# Allegro board senior design v3.brd
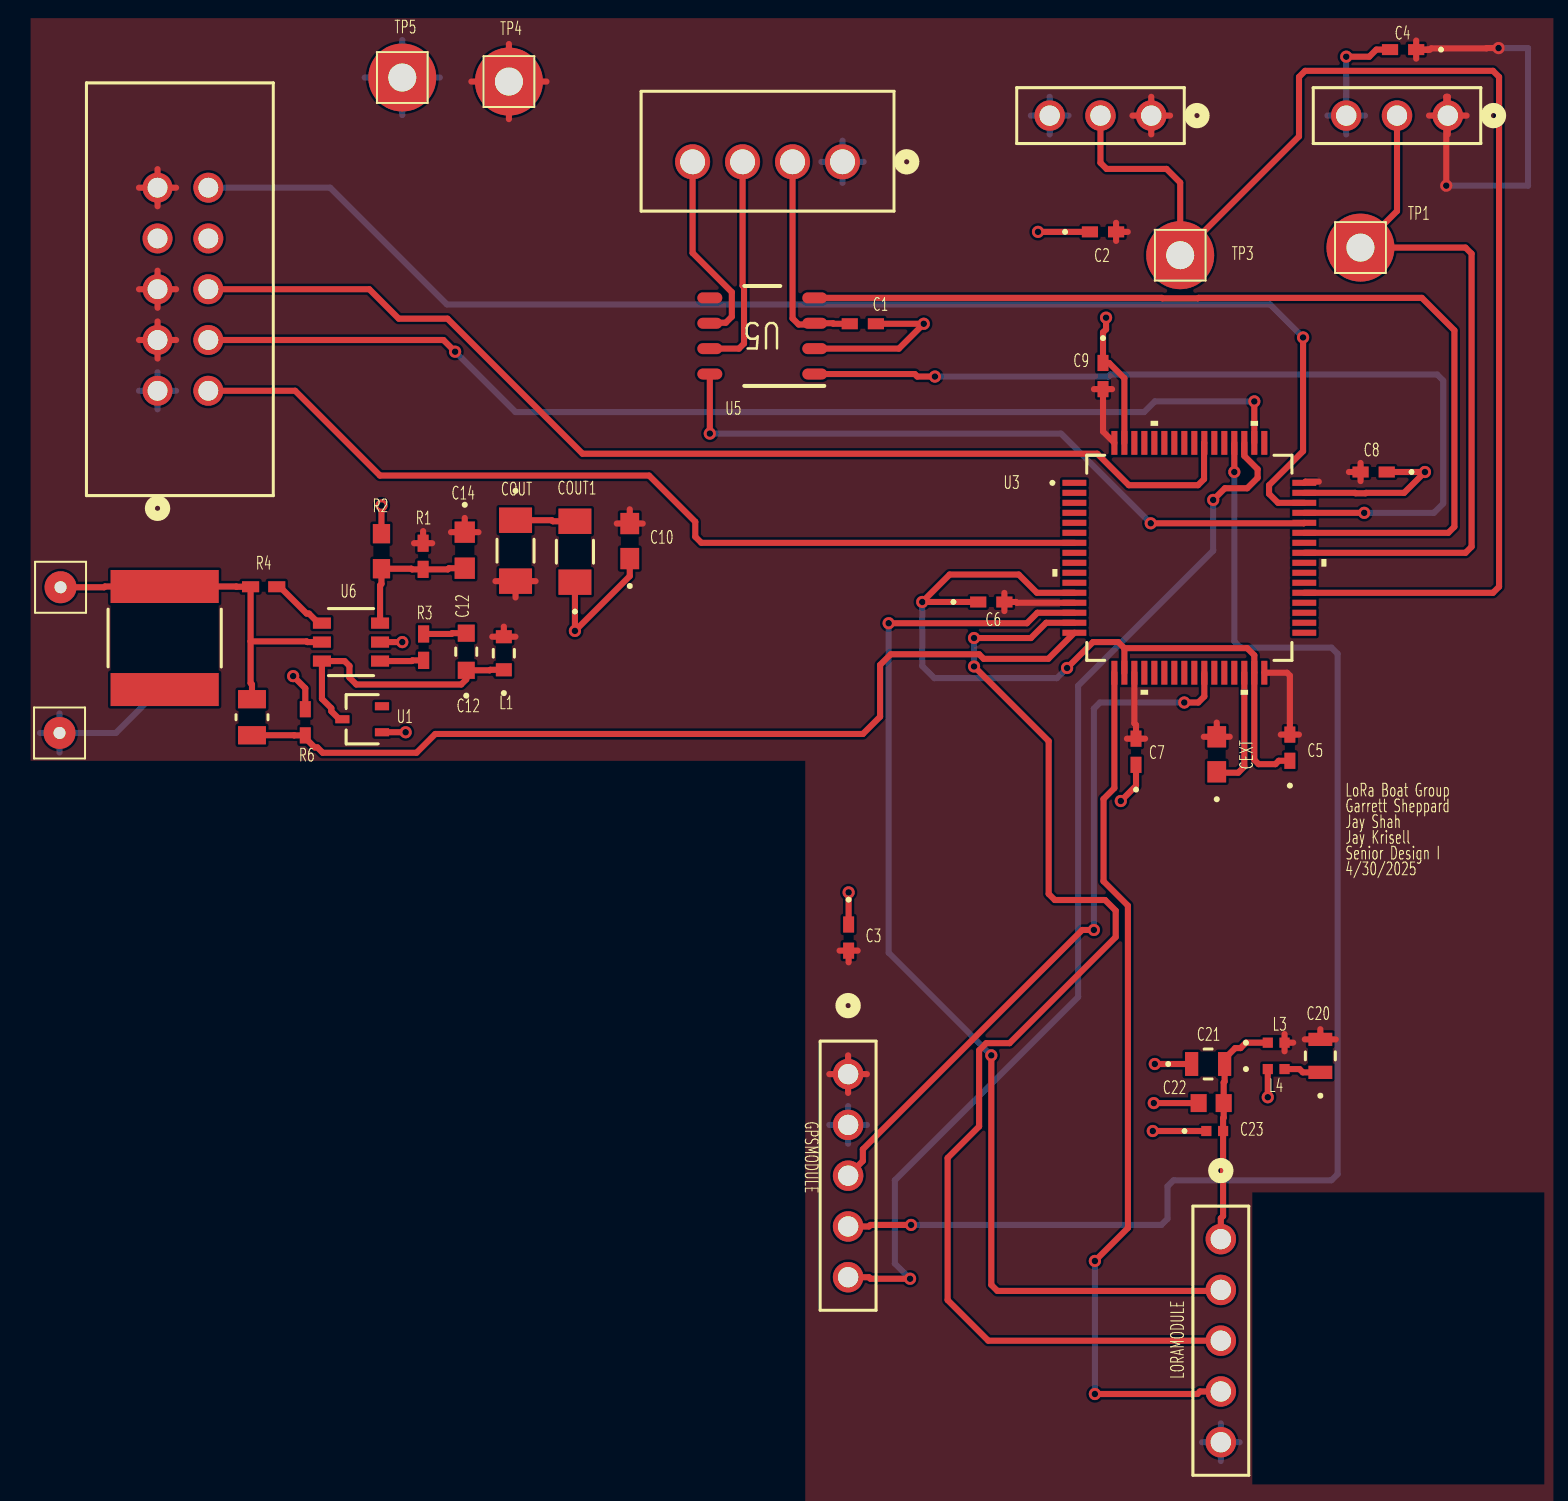
[diagram p0: board, top side]
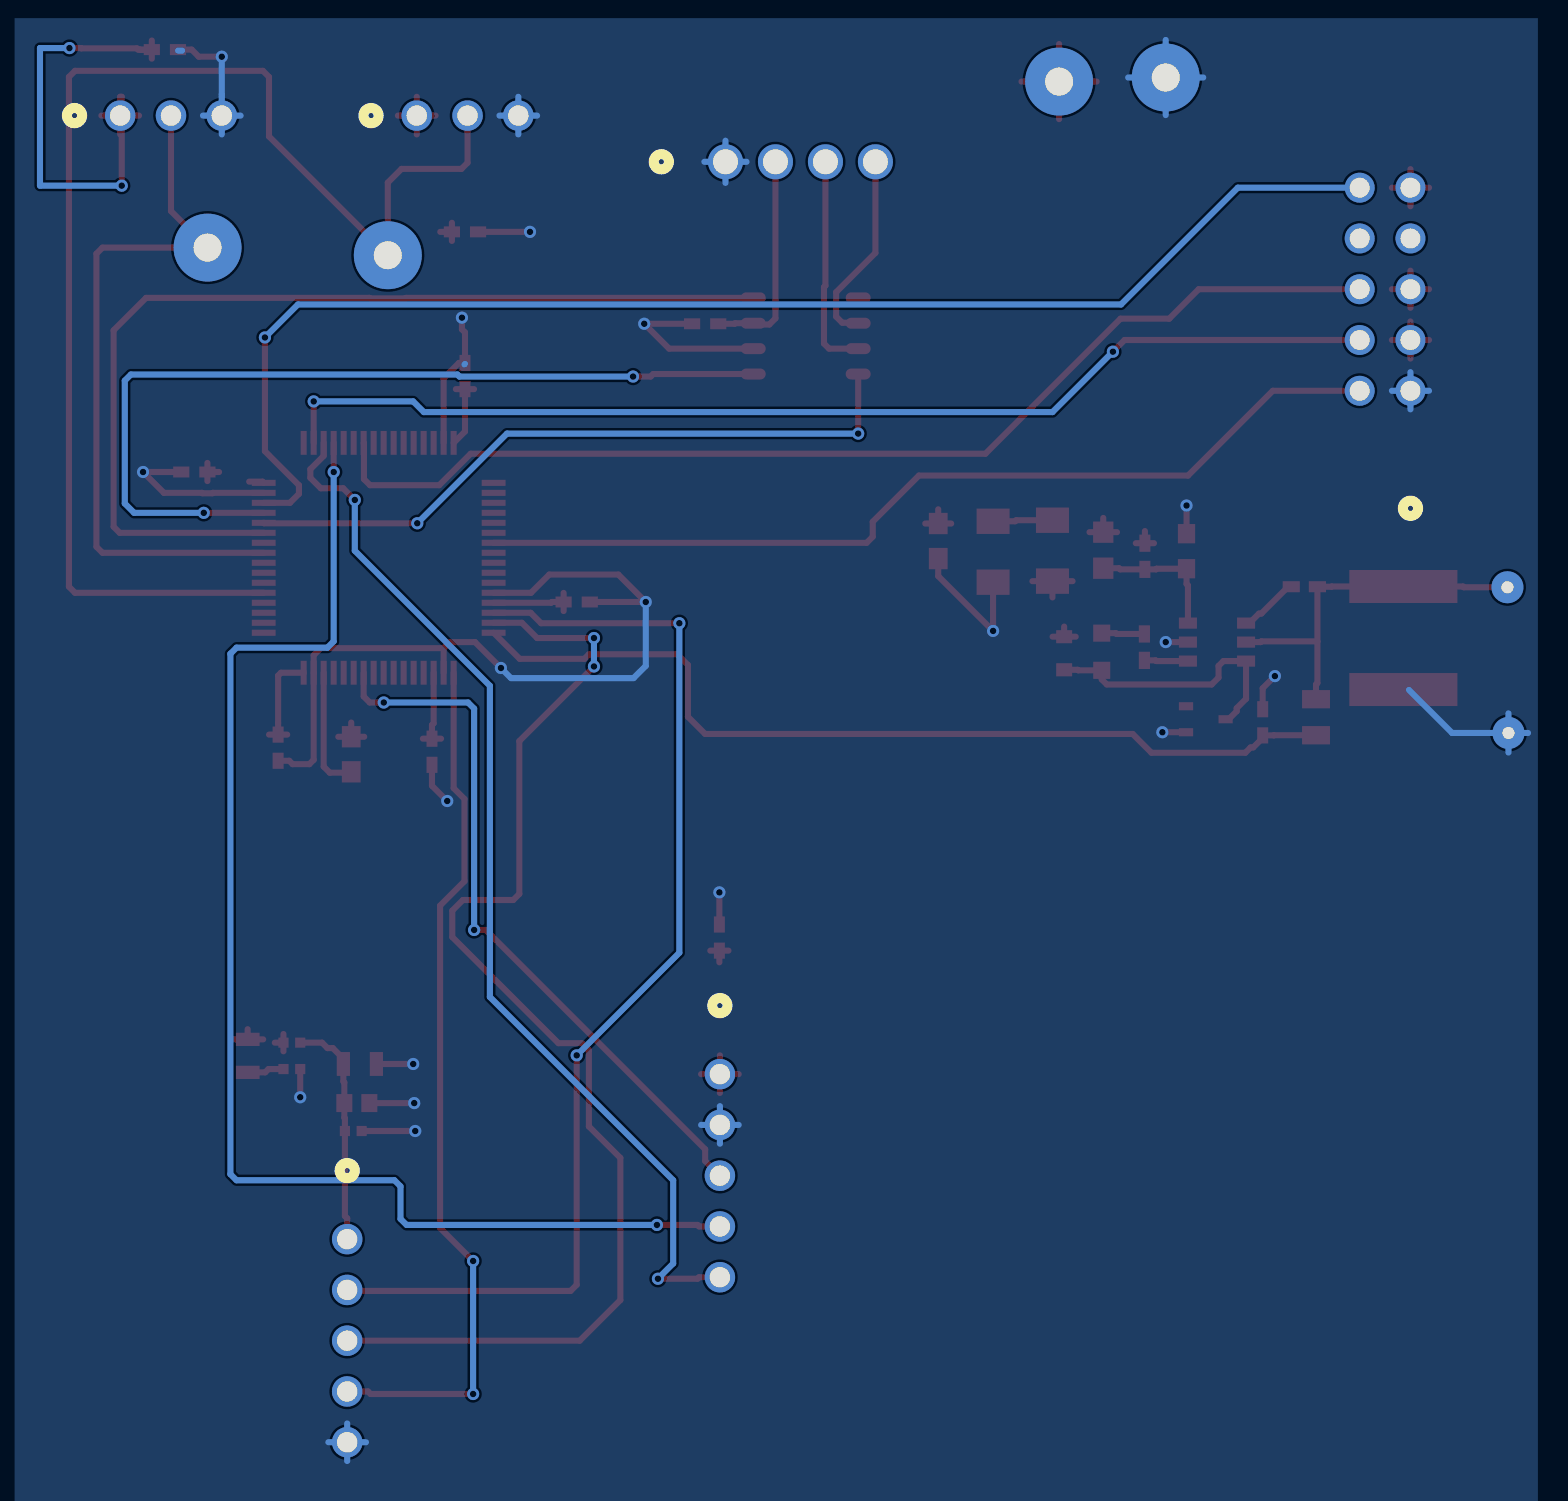
[diagram p1: board, bottom side, seen from below]

No outline. copper layers: TOP, BOTTOM. Coordinates in mm from the lowest, leftmost part position.

## Design rules (mm)
constraint set DEFAULT: min track width 0.305

## Placement (name value [footprint] x y rotation side)
C1  100n  [CAP_CL05_SAM-M]  40.18 45.8 180 top
C2  100n  [CAP_CL05_SAM-M]  52.2 50.39 0 top
C3  100n  [CAP_CL05_SAM-M]  39.47 15.09 270 top
C4  100n  [CAP_CL05_SAM-M]  67.21 59.51 180 top
C5  100n  [CAP_CL05_SAM-M]  61.54 24.59 90 top
C6  100n  [CAP_CL05_SAM-M]  46.61 31.88 0 top
C7  100n  [CAP_CL05_SAM-M]  53.85 24.38 90 top
C8  100n  [CAP_CL05_SAM-M]  65.74 38.38 180 top
C9  100n  [CAP_CL05_SAM-M]  52.2 43.18 270 top
C10  4.7uF  [CAP_0603_CL10A_1P6XP8_SAM-M]  28.52 34.92 90 top
C12  .1uf  [CAP_CL10_SAM-M]  20.35 29.39 90 top
C14  470pF  [CAP_0603G_AVX-M]  20.27 34.47 270 top
C20  10uF  [G-21_MUR-L]  63.07 9.17 90 top
C21  10uF  [G-21_MUR-L]  57.45 8.76 0 top
C22  .1uF  [CAPC17595_95N_KEM-L]  57.61 6.81 0 top
C23  47pF  [CAP_GJM1555C1H220JB01__MUR-L]  57.79 5.41 0 top
CANHEADER  CONN_B4B-XH-A  [CONN_B4B-XH-A_JST]  39.17 53.9 0 top
CEXT  4.7 uF  [CAP_0603_CL10A_1P6XP8_SAM-M]  57.89 24.26 90 top
CIN  10uF  [CAP_NTS_55_2P8T_NIP]  5.26 30.07 90 top
COUT  10uf  [G-31_MUR-M]  22.81 34.44 270 top
COUT1  10uf  [G-31_MUR-M]  25.78 34.39 90 top
GND  Battery-  [AMV_CON1]  0 25.32 0 top
GPSMODULE  CONN5_1LFBN-RC  [CONN5_1LFBN-RC_SUL]  39.45 8.25 270 top
JTAG  CONN_010P_000C_1  [CONN_SBH11-PBPC-D05-ST-BK_SUL]  4.9 42.44 90 top
L1  4.7uH  [IND_1608_TDK]  22.23 29.31 90 top
L3  INDUCTOR  [IND_BLM15_0402_MUR-L]  60.86 9.83 0 top
L4  INDUCTOR  [IND_BLM15_0402_MUR-L]  60.86 8.51 0 top
LORAMODULE  CONN5_1LFBN-RC  [CONN5_1LFBN-RC_SUL]  58.09 0 270 top
R1  15K  [RC0402N_PAN-M]  18.19 34.16 270 top
R2  4.7K  [RC0603N_YAG-M]  16.1 34.42 90 top
R3  51  [RC0402N_YAG-M]  18.21 29.62 270 top
R4  5.1K  [RC0402N_PAN-M]  10.21 32.64 0 top
R5  30K  [RES_R0805_ROM-M]  9.63 26.11 270 top
R6  10K  [RES_1005_SAM-M]  12.29 25.86 270 top
SPEEDCONTROLLER  CONN_PPTC031  [CONN_PPTC031_SUL]  69.44 56.21 0 top
STEERINGSERVO  CONN_PPTC031  [CONN_PPTC031_SUL]  54.61 56.21 0 top
TP1  TEST POINT  [AMV_TEST_POINT]  65.07 49.61 0 top
TP3  TEST POINT  [AMV_TEST_POINT]  56.06 49.23 0 top
TP4  TEST POINT  [AMV_TEST_POINT]  22.48 57.91 0 top
TP5  TEST POINT  [AMV_TEST_POINT]  17.15 58.12 0 top
U1  SB007-03Q-TL-E  [SOT-323-3_2X1P25_ONS-L]  15.14 26.01 90 top
U3  STM32F4XXR2  [LQFP64-10X10MM]  56.52 34.09 0 top
U5  TCAN1042H-Q1D  [D0008A_L]  35.15 45.19 180 top
U6  R1240N001x  [SOT-23-6W_PE-SOT23-6W-0512_NMD]  14.58 29.87 0 top
VIN  Battery+  [AMV_CON1]  0.05 32.61 0 top

## Library data of the parts
C1-C10 C12 C14 C20-C23 CEXT COUT COUT1 = C: User Part Number: PN; Tolerance: TOL
CANHEADER = B4B-XH-A: User Part Number: PN; Tolerance: TOL
CIN = KTS500B106M55N0T00: User Part Number: PN; Tolerance: TOL
GND VIN = CON1
GPSMODULE LORAMODULE = PPTC051LFBN-RC: User Part Number: PN; Tolerance: TOL
JTAG = SBH11-PBPC-D05-ST-BK: User Part Number: PN; Tolerance: TOL
L1 = SLF7045T-4R7M2R0-PF: User Part Number: PN; Tolerance: TOL
L3 L4 = INDUCTOR: User Part Number: PN; Tolerance: TOL
R1-R6 = R: User Part Number: PN; Tolerance: TOL
SPEEDCONTROLLER STEERINGSERVO = PPTC031LFBN-RC: User Part Number: PN; Tolerance: TOL
TP1 TP3-TP5 = TEST POINT
U1 = SB007-03Q-TL-E: User Part Number: PN; Tolerance: TOL
U3 = STM32F446RET6TR: User Part Number: PN; Tolerance: TOL
U5 = TCAN1042HDRQ1: Tolerance: TOL; User Part Number: PN
U6 = R1240N001B-TR-FE: User Part Number: PN; Tolerance: TOL

## Footprints (pads in the part's own frame, mm; a bottom-side part is the same pattern mirrored in y, then rotated)
AMV_CON1
  round 1.6 hole 0.6: 1(0,0)
AMV_TEST_POINT
  round 3.4 hole 1.4: 1(0,0)
CAP_0603_CL10A_1P6XP8_SAM-M
  rect 1.067x0.94 smd: 1(-0.876,0) 2(0.876,0)
CAP_0603G_AVX-M
  rect 1.067x1.016 smd: 1(-0.902,0) 2(0.902,0)
CAP_CL05_SAM-M
  rect 0.809x0.551 smd: 1(-0.654,0) 2(0.654,0)
CAP_CL10_SAM-M
  rect 0.859x0.851 smd: 1(-0.929,0) 2(0.929,0)
CAP_GJM1555C1H220JB01__MUR-L
  rect 0.508x0.508 smd: 1(-0.419,0) 2(0.419,0)
CAP_NTS_55_2P8T_NIP
  rect 1.651x5.41 smd: 1(-2.578,0) 2(2.578,0)
CAPC17595_95N_KEM-L
  rect 0.802x0.899 smd: 1(-0.626,0) 2(0.626,0)
CONN5_1LFBN-RC_SUL
  round 1.524 hole 1.016: 1(0,0) 2(2.54,0) 3(5.08,0) 4(7.62,0) 5(10.16,0)
CONN_B4B-XH-A_JST
  round 1.753 hole 1.245: 1(0,0) 2(-2.5,0) 3(-5,0) 4(-7.5,0)
CONN_PPTC031_SUL
  round 1.524 hole 1.016: 1(0,0) 2(-2.54,0) 3(-5.08,0)
CONN_SBH11-PBPC-D05-ST-BK_SUL
  round 1.499 hole 0.991: 1(0,0) 2(0,-2.54) 3(2.54,0) 4(2.54,-2.54) 5(5.08,0) 6(5.08,-2.54) 7(7.62,0) 8(7.62,-2.54) 9(10.16,0) 10(10.16,-2.54)
D0008A_L
  oval 1.25x0.55 smd: 1(-2.625,1.905) 2(-2.625,0.635) 3(-2.625,-0.635) 4(-2.625,-1.905) 5(2.625,-1.905) 6(2.625,-0.635) 7(2.625,0.635) 8(2.625,1.905)
G-21_MUR-L
  rect 0.66x1.194 smd: 1(-0.826,0) 2(0.826,0)
G-31_MUR-M
  rect 1.27x1.651 smd: 1(-1.524,0) 2(1.524,0)
IND_1608_TDK
  rect 0.656x0.8 smd: 1(-0.828,0) 2(0.828,0)
IND_BLM15_0402_MUR-L
  rect 0.508x0.508 smd: 1(-0.419,0) 2(0.419,0)
LQFP64-10X10MM
  rect 1.194x0.305 smd: 1(-5.75,3.75) 2(-5.75,3.25) 3(-5.75,2.75) 4(-5.75,2.25) 5(-5.75,1.75) 6(-5.75,1.25) 7(-5.75,0.75) 8(-5.75,0.25) 9(-5.75,-0.25) 10(-5.75,-0.75) 11(-5.75,-1.25) 12(-5.75,-1.75) 13(-5.75,-2.25) 14(-5.75,-2.75) 15(-5.75,-3.25) 16(-5.75,-3.75) 33(5.75,-3.75) 34(5.75,-3.25) 35(5.75,-2.75) 36(5.75,-2.25) 37(5.75,-1.75) 38(5.75,-1.25) 39(5.75,-0.75) 40(5.75,-0.25) 41(5.75,0.25) 42(5.75,0.75) 43(5.75,1.25) 44(5.75,1.75) 45(5.75,2.25) 46(5.75,2.75) 47(5.75,3.25) 48(5.75,3.75)
  rect 0.305x1.194 smd: 17(-3.75,-5.75) 18(-3.25,-5.75) 19(-2.75,-5.75) 20(-2.25,-5.75) 21(-1.75,-5.75) 22(-1.25,-5.75) 23(-0.75,-5.75) 24(-0.25,-5.75) 25(0.25,-5.75) 26(0.75,-5.75) 27(1.25,-5.75) 28(1.75,-5.75) 29(2.25,-5.75) 30(2.75,-5.75) 31(3.25,-5.75) 32(3.75,-5.75) 49(3.75,5.75) 50(3.25,5.75) 51(2.75,5.75) 52(2.25,5.75) 53(1.75,5.75) 54(1.25,5.75) 55(0.75,5.75) 56(0.25,5.75) 57(-0.25,5.75) 58(-0.75,5.75) 59(-1.25,5.75) 60(-1.75,5.75) 61(-2.25,5.75) 62(-2.75,5.75) 63(-3.25,5.75) 64(-3.75,5.75)
RC0402N_PAN-M
  rect 0.859x0.551 smd: 1(-0.654,0) 2(0.654,0)
RC0402N_YAG-M
  rect 0.864x0.559 smd: 1(-0.66,0) 2(0.66,0)
RC0603N_YAG-M
  rect 0.965x0.864 smd: 1(-0.876,0) 2(0.876,0)
RES_1005_SAM-M
  rect 0.809x0.551 smd: 1(-0.654,0) 2(0.654,0)
RES_R0805_ROM-M
  rect 0.914x1.397 smd: 1(-0.902,0) 2(0.902,0)
SOT-23-6W_PE-SOT23-6W-0512_NMD
  rect 0.902x0.559 smd: 1(-1.454,0.95) 2(-1.454,0) 3(-1.454,-0.95) 4(1.454,-0.95) 5(1.454,0) 6(1.454,0.95)
SOT-323-3_2X1P25_ONS-L
  rect 0.406x0.711 smd: 1(-0.65,-0.991) 2(0.65,-0.991) 3(0,0.991)

## Nets
3.3V: C2.2 C3.2 C4.1 C5.2 C6.2 C7.2 C8.2 C9.2 C10.2 C14.1 C20.2 CEXT.2 COUT.2 GPSMODULE.1 JTAG.3 JTAG.5 JTAG.9 L1.2 L3.2 R1.1 SPEEDCONTROLLER.1 STEERINGSERVO.1 TP4.1 U3.13 U3.19 U3.32 U3.48 U3.64
GND: CIN.1
VBAT: U3.1
0: C1.1 C2.1 C3.1 C4.2 C5.1 C6.1 C7.1 C8.1 C9.1 C10.1 C21.1 C22.1 C23.1 CANHEADER.1 COUT1.1 GND.1 GPSMODULE.2 JTAG.1 L4.1 LORAMODULE.5 R2.2 R6.1 SPEEDCONTROLLER.3 STEERINGSERVO.3 TP5.1 U1.1 U3.12 U3.18 U3.31 U3.47 U3.63 U5.2 U6.5
ADC: R5.2 R6.2 U3.16
PA13 TMS: JTAG.10 U3.46
PA14 TCLK: U3.49
PA14TCLK: JTAG.8
PA15 TDI: JTAG.4 U3.50
PB3 TBO: JTAG.6 U3.55
RESET: JTAG.2 U3.7
N04277: GPSMODULE.3 U3.26
N04281: GPSMODULE.4 U3.52
N04285: GPSMODULE.5 U3.51
N04355: SPEEDCONTROLLER.2 TP1.1 U3.41
N04395: STEERINGSERVO.2 TP3.1 U3.37
N04429: C21.2 C22.2 C23.2 L3.1 LORAMODULE.1
N04477: LORAMODULE.2 U3.14
N04485: LORAMODULE.3 U3.15
N04755: U3.44 U5.8
N04759: U3.43 U5.4
N04763: U3.45 U5.1
N04855: CANHEADER.4 U5.6
N17576: C14.2 R1.2 R2.1 U6.6
N17942: R3.2 U6.4
N18028: C12.1 L1.1 U1.3 U6.3
N24517: LORAMODULE.4 U3.17
N24691: CANHEADER.3 U5.7
N24886: C1.2 CANHEADER.2 U5.3(VCC)
N27410: C20.1 L4.2
N27791: CEXT.1 U3.30
N055670: R4.2 U6.1
N061071: C12.2 R3.1
N068040: COUT.1 COUT1.2
N088060: CIN.2 R4.1 R5.1 U6.2(VIN) VIN.1

Pads without a net: JTAG 7; U1 2; U3 2 3 4 5 6 8 9 10 11 20 21 22 23 24 25 27 28 29 33 34 35 36 38 39 40 42 53 54 56 57 58 59 60 61 62; U5 5

## Via types
v1: diameter 0.61, hole 0.33, TOP to BOTTOM, 39 vias

## Routing (per net, layer and track width the routed paths; a pad name or vN(x,y) marks a point on that pad's centre or on a via; arc(x,y) is an arc through that point)
3.3V: length 90.9
  TOP w0.305: 3.97,52.6 JTAG.9 ; JTAG.9 4.9,53.53 ; JTAG.9 4.9,51.68 ; JTAG.9 5.83,52.6 ; 68.45,59.51 68.43,59.5 67.88,59.5 C4.1 ; 68.45,59.51 C4.1 ; 68.45,59.51 68.55,59.51 68.61,59.57 71.38,59.57 71.4,59.59 v1(71.98,59.59) ; C9.2 52.65,42.53 ; C9.2 51.74,42.53 ; C9.2 52.2,40.4 U3.64 ; C14.1 20.27,36.08 ; C14.1 20.96,35.37 ; C14.1 19.58,35.37 ; 22.81,32.11 COUT.2 ; COUT.2 21.81,32.92 ; COUT.2 23.81,32.92 ; 57.24,25.13 CEXT.2 ; CEXT.2 58.53,25.13 ; CEXT.2 57.89,25.85 ; 68.5,56.21 SPEEDCONTROLLER.1 ; SPEEDCONTROLLER.1 70.38,56.21 ; SPEEDCONTROLLER.1 69.44,57.15 69.37,57.15 v1(69.37,52.7) ; SPEEDCONTROLLER.1 69.44,55.27 ; STEERINGSERVO.1 55.55,56.21 ; STEERINGSERVO.1 53.67,56.21 ; STEERINGSERVO.1 54.61,57.15 ; STEERINGSERVO.1 54.61,55.27 ; R1.1 18.64,34.82 ; R1.1 18.19,35.43 ; R1.1 17.73,34.82 ; 47.26,31.42 C6.2 ; C6.2 47.85,31.88 47.89,31.84 U3.13 ; C6.2 47.26,32.33 ; 27.88,35.8 C10.2 ; C10.2 28.52,36.51 ; C10.2 29.17,35.8 ; 20.6,57.91 TP4.1 ; TP4.1 22.48,59.79 ; TP4.1 22.48,56.03 ; TP4.1 24.36,57.91 ; C3.2 39.93,14.43 ; C3.2 39.02,14.43 ; C3.2 39.47,13.85 ; JTAG.3 5.83,44.98 ; JTAG.3 4.9,45.91 ; JTAG.3 3.97,44.98 ; JTAG.3 4.9,44.06 ; 61.28,9.4 L3.2 ; L3.2 61.71,9.83 ; L3.2 61.28,10.26 ; GPSMODULE.1 39.45,9.2 ; GPSMODULE.1 39.45,7.31 ; GPSMODULE.1 40.39,8.25 ; GPSMODULE.1 38.51,8.25 ; U3.19 53.76,25.81 53.85,25.72 C7.2 ; C4.1 67.86,59.97 ; C4.1 67.86,59.06 ; C8.2 65.08,38.83 ; C8.2 65.08,37.93 ; C8.2 64.5,38.38 ; C7.2 54.3,25.04 ; C7.2 53.39,25.04 ; C2.2 52.85,50.85 ; C2.2 52.85,49.94 ; C2.2 53.43,50.39 ; 3.97,47.52 JTAG.5 ; JTAG.5 4.9,46.6 ; JTAG.5 5.83,47.52 ; JTAG.5 4.9,48.45 ; C20.2 63.84,9.99 ; C20.2 62.29,9.99 ; C20.2 63.07,10.5 ; 61.09,25.24 C5.2 ; C5.2 62,25.24 ; C5.2 61.54,28.19 61.4,28.34 U3.32 ; L1.2 22.23,30.65 ; L1.2 21.65,30.14 ; L1.2 22.8,30.14 ; U3.48 62.32,37.9 62.99,37.9
  BOTTOM w0.305: v1(71.98,59.59) 73.46,59.59 73.46,52.7 v1(69.37,52.7)
0: length 135.7
  TOP w0.305: C3.1 v1(39.47,17.35) ; C6.1 v1(43.15,31.88) 44.53,33.25 47.98,33.25 48.89,32.34 U3.12 ; 53.27,29.57 U3.18 ; 53.27,29.57 52.96,29.87 51.69,29.87 v1(50.4,28.57) ; 53.27,29.57 59.41,29.57 59.76,29.21 U3.31 59.76,23.98 59.98,23.76 60.82,23.76 60.99,23.93 C5.1 ; R2.2 v1(16.1,36.7) ; COUT1.1 v1(25.78,30.43) 28.52,33.17 C10.1 ; C21.1 v1(54.79,8.76) ; v1(53.09,21.92) 53.85,22.68 C7.1 ; U3.63 53.27,43.07 52.5,43.83 C9.1 52.2,45.36 52.35,45.52 v1(52.35,46.1) ; C1.1 v1(43.23,45.8) 41.99,44.55 U5.2 ; v1(64.36,59.16) 65.51,59.16 65.87,59.51 C4.2 ; U1.1 v1(17.31,25.36) ; U3.47 64.81,37.34 64.83,37.32 65.33,37.32 65.35,37.34 67.26,37.34 v1(68.3,38.38) C8.1 ; v1(11.68,28.17) 12.29,27.56 R6.1 ; C22.1 v1(54.74,6.81) ; L4.1 v1(60.44,7.1) ; C23.1 v1(54.69,5.41) ; C2.1 v1(48.95,50.39) ; U6.5 v1(17.15,29.87)
  BOTTOM w0.305: 52.2,43.79 52.22,43.76 ; SPEEDCONTROLLER.3 65.3,56.21 ; SPEEDCONTROLLER.3 v1(64.36,59.16) ; SPEEDCONTROLLER.3 63.42,56.21 ; SPEEDCONTROLLER.3 64.36,55.27 ; 39.17,52.84 CANHEADER.1 ; CANHEADER.1 38.11,53.9 ; CANHEADER.1 40.22,53.9 ; CANHEADER.1 39.17,54.95 ; STEERINGSERVO.3 49.53,57.15 ; STEERINGSERVO.3 48.59,56.21 ; STEERINGSERVO.3 49.53,55.27 ; STEERINGSERVO.3 50.47,56.21 ; GND.1 2.82,25.32 4.98,27.48 ; GND.1 -0.98,25.32 ; GND.1 0,24.35 ; GND.1 0,26.3 ; TP5.1 17.15,59.99 ; TP5.1 19.02,58.12 ; TP5.1 15.27,58.12 ; TP5.1 17.15,56.24 ; JTAG.1 5.83,42.44 ; JTAG.1 3.97,42.44 ; JTAG.1 4.9,43.37 ; JTAG.1 4.9,41.52 ; LORAMODULE.5 58.09,-9.22 ; LORAMODULE.5 58.09,-11.1 ; LORAMODULE.5 59.03,-10.16 ; LORAMODULE.5 57.15,-10.16 ; v1(50.4,28.57) 49.89,28.07 43.76,28.07 43.15,28.68 v1(43.15,31.88) ; 66.34,59.46 66.55,59.46 ; 38.51,5.71 GPSMODULE.2 ; GPSMODULE.2 39.45,4.77 ; GPSMODULE.2 40.39,5.71 ; GPSMODULE.2 39.45,6.66
ADC: length 45.8
  TOP w0.305: U3.16 49.46,29.03 46.23,29.03 46,29.26 41.58,29.26 41.05,28.73 41.05,26.14 40.18,25.27 18.8,25.27 17.86,24.33 13.16,24.33 12.9,24.6 12.77,24.6 12.29,25.07 R6.2 11.74,25.2 11.73,25.21 R5.2
PA13 TMS: length 68.3
  TOP w0.305: U3.46 60.95,36.84 60.5,37.29 60.5,37.72 62.2,39.42 v1(62.2,45.11)
  BOTTOM w0.305: JTAG.10 13.54,52.6 19.38,46.76 60.55,46.76 v1(62.2,45.11)
PA15 TDI: length 56.1
  TOP w0.305: U3.50 v1(59.76,41.91) ; v1(19.79,44.4) 19.2,44.98 JTAG.4
  BOTTOM w0.305: v1(19.79,44.4) 22.81,41.38 54.25,41.38 54.79,41.91 v1(59.76,41.91)
PB3 TBO: length 55.8
  TOP w0.305: U3.55 57.25,39.82 57.25,38.02 56.95,37.72 53.49,37.72 51.91,39.29 26.16,39.29 19.41,46.05 16.97,46.05 15.49,47.52 JTAG.6
RESET: length 46.9
  TOP w0.305: JTAG.2 11.79,42.44 16.03,38.2 29.49,38.2 31.8,35.89 31.8,35.14 32.11,34.84 U3.7
N04277: length 35.8
  TOP w0.305: v1(51.74,15.47) 51.16,15.47 40.18,4.5 40.18,3.91 GPSMODULE.3 ; U3.26 57.27,27.15 56.96,26.85 v1(56.26,26.85)
  BOTTOM w0.305: v1(56.26,26.85) 52.04,26.85 51.74,26.54 v1(51.74,15.47)
N04281: length 67.9
  TOP w0.305: GPSMODULE.4 40.49,0.63 40.56,0.71 v1(42.6,0.71) ; U3.52 v1(58.76,38.38)
  BOTTOM w0.305: v1(42.6,0.71) 55.12,0.71 55.42,1.02 55.42,2.64 55.73,2.95 63.63,2.95 63.93,3.25 63.93,29.29 63.63,29.59 59.08,29.59 58.76,29.91 v1(58.76,38.38)
N04285: length 53.7
  TOP w0.305: GPSMODULE.5 40.49,-1.91 40.56,-1.98 v1(42.55,-1.98) ; U3.51 59.27,39.19 59.93,38.52 59.93,38.09 59.41,37.57 58.29,37.57 v1(57.71,36.98)
  BOTTOM w0.305: v1(57.71,36.98) 57.71,34.44 50.95,27.69 50.95,12.12 41.78,2.95 41.78,-1.22 v1(42.55,-1.98)
N04355: length 36.2
  TOP w0.305: SPEEDCONTROLLER.2 66.9,51.44 TP1.1 70.33,49.61 70.63,49.3 70.63,34.64 70.33,34.34 U3.41
N04395: length 67.4
  TOP w0.305: STEERINGSERVO.2 52.07,53.85 52.37,53.54 55.37,53.54 56.06,52.86 TP3.1 62,55.17 62,58.14 62.31,58.45 71.7,58.45 72.01,58.14 72.01,32.64 71.7,32.34 U3.37
N04429: length 11.6
  TOP w0.305: L3.1 59.35,9.83 59.07,9.56 58.81,9.56 58.28,9.03 C21.2 58.28,7.89 58.23,7.84 C22.2 58.23,6.08 58.2,6.05 C23.2 58.2,1.16 58.09,1.04 LORAMODULE.1
N04477: length 56.4
  TOP w0.305: 58.09,-2.54 58.04,-2.59 46.91,-2.59 46.61,-2.29 v1(46.61,9.19) ; U3.14 48.91,31.34 48.39,30.81 v1(41.47,30.81)
  BOTTOM w0.305: v1(46.61,9.19) 41.47,14.33 v1(41.47,30.81)
N04485: length 61.5
  TOP w0.305: LORAMODULE.3 46.46,-5.08 44.42,-3.05 44.42,4.06 46,5.64 46,9.45 46.36,9.8 47.52,9.8 52.83,15.11 52.83,16.43 52.3,16.97 49.78,16.97 49.48,17.27 49.48,24.92 v1(45.75,28.65) ; U3.15 49.35,30.84 48.59,30.07 v1(45.75,30.07)
  BOTTOM w0.305: v1(45.75,28.65) v1(45.75,30.07)
N04755: length 34.6
  TOP w0.305: v1(54.58,35.81) 62.24,35.81 U3.44 ; U5.8 v1(32.53,40.3)
  BOTTOM w0.305: v1(54.58,35.81) 50.1,40.3 v1(32.53,40.3)
N04759: length 50.1
  TOP w0.305: U3.43 69.47,35.34 69.77,35.64 69.77,45.47 68.15,47.09 56.98,47.09 56.95,47.07 55.16,47.07 55.14,47.09 U5.4
N04763: length 44.9
  TOP w0.305: U5.1 42.78,43.28 42.91,43.15 v1(43.79,43.15) ; U3.45 v1(65.26,36.34)
  BOTTOM w0.305: v1(43.79,43.15) 52.47,43.15 52.58,43.26 68.91,43.26 69.22,42.95 69.22,36.8 68.75,36.34 v1(65.26,36.34)
N04855: length 9.8
  TOP w0.305: CANHEADER.4 31.67,49.34 33.63,47.38 33.63,46.15 33.32,45.85 32.55,45.85 U5.6
N17576: length 7
  TOP w0.305: U6.6 16.03,32.71 16.1,32.78 R2.1 17.6,33.54 17.63,33.51 R1.2 19.42,33.51 19.48,33.57 C14.2
N17942: length 2.2
  TOP w0.305: R3.2 17.65,28.96 17.62,28.92 U6.4
N18028: length 13.9
  TOP w0.305: L1.1 21.55,28.48 21.52,28.46 C12.1 20.35,28 20.09,27.75 14.85,27.75 14.5,28.09 14.5,28.68 14.26,28.92 U6.3 13.13,27.03 13.59,26.56 13.59,26.41 14,26.01 U1.3
N24517: length 43.8
  TOP w0.305: U3.17 52.76,22.56 52.22,22.02 52.22,17.91 53.44,16.69 53.44,0.56 v1(51.79,-1.09) ; LORAMODULE.4 57.05,-7.62 56.92,-7.75 v1(51.79,-7.75)
  BOTTOM w0.305: v1(51.79,-1.09) v1(51.79,-7.75)
N24691: length 10.9
  TOP w0.305: U5.7 33.99,44.55 34.24,44.81 34.24,47.63 34.17,47.7 CANHEADER.3
N24886: length 10.9
  TOP w0.305: C1.2 38.71,45.8 38.68,45.82 U5.3 37.72,45.76 36.97,45.76 36.67,46.06 CANHEADER.2
N27410: length 1.9
  TOP w0.305: C20.1 62.19,8.34 62.03,8.51 L4.2
N27791: length 6.2
  TOP w0.305: CEXT.1 57.93,23.34 58.96,23.34 59.27,23.64 U3.30
N055670: length 3
  TOP w0.305: U6.1 12.95,30.82 12.48,31.3 12.36,31.3 11.02,32.64 R4.2
N061071: length 2.2
  TOP w0.305: R3.1 19.6,30.28 19.64,30.32 C12.2
N068040: length 3
  TOP w0.305: COUT1.2 24.68,35.92 24.63,35.97 COUT.1
N088060: length 18.8
  TOP w0.305: 9.56,29.91 12.36,29.91 12.4,29.87 U6.2 ; 9.56,29.91 9.56,27.82 9.63,27.75 R5.1 ; 9.56,29.91 R4.1 8.85,32.64 8.83,32.65 CIN.2 2.27,32.65 2.24,32.61 VIN.1

## Copper pours and planes (outline as drawn; the poured copper is in the pictures)
3.3V on TOP: -1.45,61.09 74.73,61.09 74.73,-15.11 -1.45,-15.11
0 on BOTTOM: -1.47,61.09 74.73,61.09 74.73,-15.11 -1.47,-15.11

## Text on the board
Ref Des/Silkscreen Top: LoRa Boat Group | Garrett Sheppard | Jay Shah | Jay Krisell | Senior Design I | 4/30/2025
